# EAGLE board CPLD_brd_itead_to_mill (EAGLE 5.11)
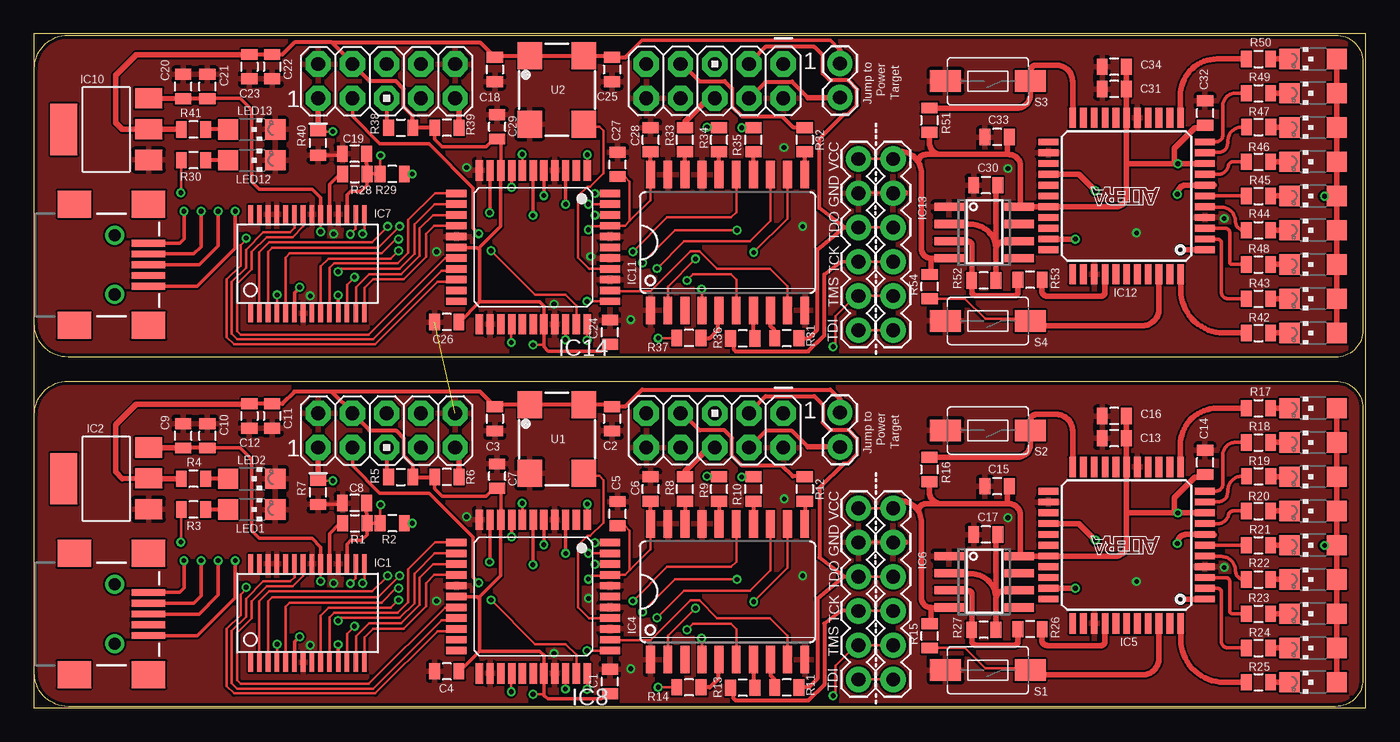
[diagram p0: board, top side]
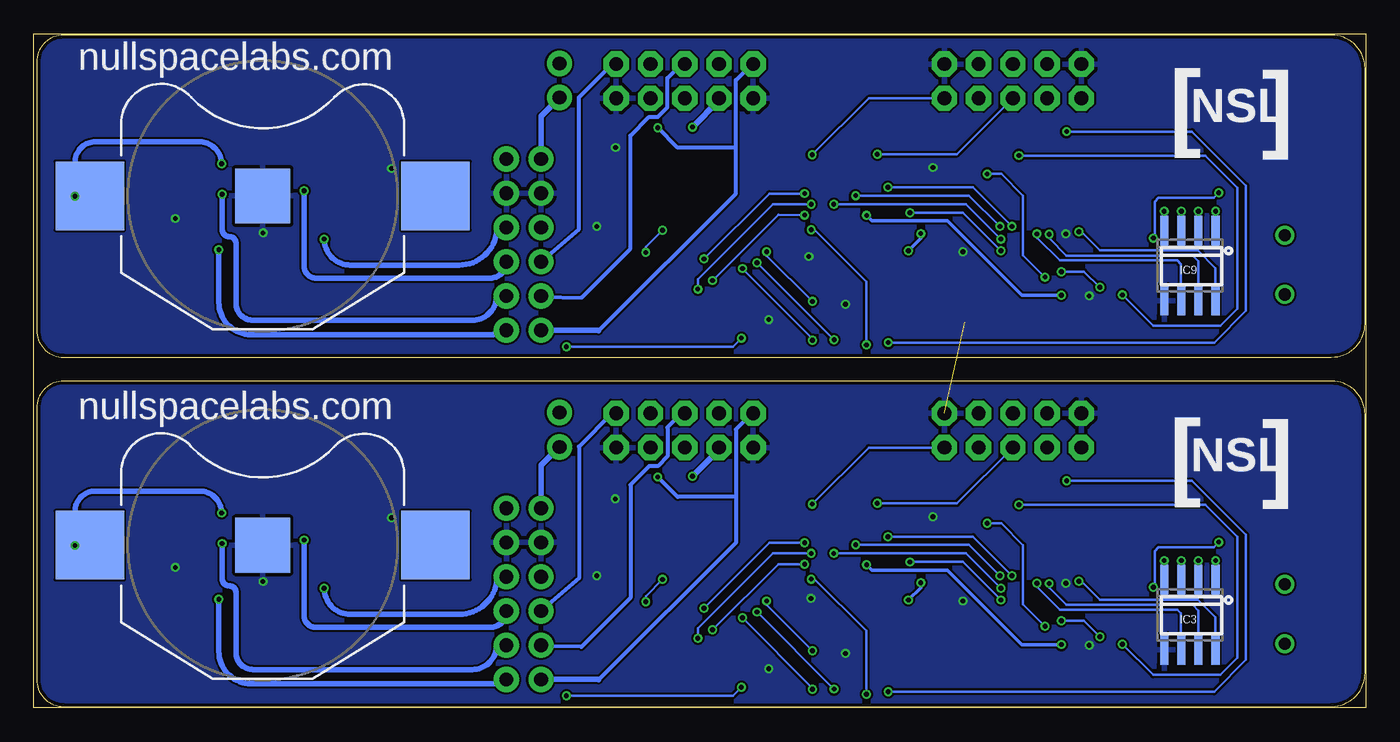
[diagram p1: board, bottom side, seen from below]

Size 98.82 x 50 mm. Coordinates in mm from the lower left corner, seen from the top.
Outline: 0,50 0,0 98.82,0 98.82,50 0,50
Outline: 2.55,0.11 arc-90 0.05,2.61 0.05,21.74 arc-90 2.55,24.24 96.6,24.24 arc-90 98.6,22.24 98.6,2.11 arc-90 96.6,0.11 2.55,0.11
Outline: 2.55,26.02 arc-90 0.05,28.52 0.05,47.39 arc-90 2.55,49.89 96.6,49.89 arc-90 98.6,47.89 98.6,28.02 arc-90 96.6,26.02 2.55,26.02
Copper layers (1*16): Top 0.035mm / dielectric 1.5mm / Bottom 0.035mm
Design rules "ITead_rule": minimum track width 6mil, minimum drill 12mil, track to track 6mil, track to pad 6mil, pad to pad 6mil, via to via 6mil, smd to smd 0mil, copper to edge 10mil, drill to drill 10mil, minimum pad ring 10mil, minimum via ring 6mil, stop-mask expansion 2mil, vias tented up to drill 100mil, thermal gap 10mil

## Footprints (pad centres in the part's own frame; a part is rotated, then mirrored left to right if it is on the bottom)
BATTCON_20MM = smd 5.08 x 5.08: 1 -12.827,0; 3 12.827,0 | smd 4.064 x 4.064: 2 0,0
0805 = smd 0.8 x 1.2: 1 -0.9,0; 2 0.9,0
SSOP28DB = smd 0.348 x 1.397: 1 -4.225,-3.656; 2 -3.575,-3.656; 3 -2.925,-3.656; 4 -2.275,-3.656; 5 -1.625,-3.656; 6 -0.975,-3.656; 7 -0.325,-3.656; 8 0.325,-3.656; 9 0.975,-3.656; 10 1.625,-3.656; 11 2.275,-3.656; 12 2.925,-3.656; 13 3.575,-3.656; 14 4.225,-3.656; 15 4.225,3.656; 16 3.575,3.656; 17 2.925,3.656; 18 2.275,3.656; 19 1.625,3.656; 20 0.975,3.656; 21 0.325,3.656; 22 -0.325,3.656; 23 -0.975,3.656; 24 -1.625,3.656; 25 -2.275,3.656; 26 -2.925,3.656; 27 -3.575,3.656; 28 -4.225,3.656
SOT223 = smd 1.499 x 2.007: 1 -2.261,-3.15; 2 0.025,-3.15; 3 2.311,-3.15 | smd 3.81 x 2.007: 4 0,3.15
SO08 = smd 0.6 x 2.2: 1 -1.905,-2.6; 2 -0.635,-2.6; 3 0.635,-2.6; 4 1.905,-2.6; 5 1.905,2.6; 6 0.635,2.6; 7 -0.635,2.6; 8 -1.905,2.6
SO20W = smd 0.66 x 2.032: 1 -5.715,-5.029; 2 -4.445,-5.029; 3 -3.175,-5.029; 4 -1.905,-5.029; 5 -0.635,-5.029; 6 0.635,-5.029; 7 1.905,-5.029; 8 3.175,-5.029; 9 4.445,-5.029; 10 5.715,-5.029; 11 5.715,5.029; 12 4.445,5.029; 13 3.175,5.029; 14 1.905,5.029; 15 0.635,5.029; 16 -0.635,5.029; 17 -1.905,5.029; 18 -3.175,5.029; 19 -4.445,5.029; 20 -5.715,5.029
TQFP44 = smd 1.5 x 0.5: 1 -5.8,4; 2 -5.8,3.2; 3 -5.8,2.4; 4 -5.8,1.6; 5 -5.8,0.8; 6 -5.8,0; 7 -5.8,-0.8; 8 -5.8,-1.6; 9 -5.8,-2.4; 10 -5.8,-3.2; 11 -5.8,-4; 23 5.8,-4; 24 5.8,-3.2; 25 5.8,-2.4; 26 5.8,-1.6; 27 5.8,-0.8; 28 5.8,0; 29 5.8,0.8; 30 5.8,1.6; 31 5.8,2.4; 32 5.8,3.2; 33 5.8,4 | smd 0.5 x 1.5: 12 -4,-5.8; 13 -3.2,-5.8; 14 -2.4,-5.8; 15 -1.6,-5.8; 16 -0.8,-5.8; 17 0,-5.8; 18 0.8,-5.8; 19 1.6,-5.8; 20 2.4,-5.8; 21 3.2,-5.8; 22 4,-5.8; 34 4,5.8; 35 3.2,5.8; 36 2.4,5.8; 37 1.6,5.8; 38 0.8,5.8; 39 0,5.8; 40 -0.8,5.8; 41 -1.6,5.8; 42 -2.4,5.8; 43 -3.2,5.8; 44 -4,5.8
TQFP44' = smd 0.55 x 1.5: P1 -4,-5.7; P2 -3.2,-5.7; P3 -2.4,-5.7; P4 -1.6,-5.7; P5 -0.8,-5.7; P6 0,-5.7; P7 0.8,-5.7; P8 1.6,-5.7; P9 2.4,-5.7; P10 3.2,-5.7; P11 4,-5.7; P23 4,5.7; P24 3.2,5.7; P25 2.4,5.7; P26 1.6,5.7; P27 0.8,5.7; P28 0,5.7; P29 -0.8,5.7; P30 -1.6,5.7; P31 -2.4,5.7; P32 -3.2,5.7; P33 -4,5.7 | smd 1.5 x 0.55: P12 5.7,-4; P13 5.7,-3.2; P14 5.7,-2.4; P15 5.7,-1.6; P16 5.7,-0.8; P17 5.7,0; P18 5.7,0.8; P19 5.7,1.6; P20 5.7,2.4; P21 5.7,3.2; P22 5.7,4; P34 -5.7,4; P35 -5.7,3.2; P36 -5.7,2.4; P37 -5.7,1.6; P38 -5.7,0.8; P39 -5.7,0; P40 -5.7,-0.8; P41 -5.7,-1.6; P42 -5.7,-2.4; P43 -5.7,-3.2; P44 -5.7,-4
1X06 = drill 1.016 pad 1.88 round: 1 0,0; 2 2.54,0; 3 5.08,0; 4 7.62,0; 5 10.16,0; 6 12.7,0
AVR_ICSP = drill 1.016 pad 1.88 octagon: 1 -1.27,5.08; 2 1.27,5.08; 3 -1.27,2.54; 4 1.27,2.54; 5 -1.27,0; 6 1.27,0; 7 -1.27,-2.54; 8 1.27,-2.54; 9 -1.27,-5.08; 10 1.27,-5.08
1X02 = drill 1.016 pad 1.88 round: 1 0,0; 2 2.54,0
CHIPLED_1206 = smd 1.5 x 1.5: A 0,-1.75; C 0,1.75
TACTILE-SWITCH-1101NE = smd 2.3 x 1.6: P$1 -3.15,0; P$2 3.15,0
CRYSTAL-SMD-7X5 = smd 2 x 1.8: P$1 -2.54,-2; P$2 2.54,-2; P$3 2.54,2; P$4 -2.54,2
USB-MINIB-NOSTOP = smd 2.5 x 0.5: D+ 2.5,0; D- 2.5,0.8; GND 2.5,-1.6; ID 2.5,-0.8; VBUS 2.5,1.6 | smd 2.5 x 2: G1 -3,-4.5; G2 -3,4.5; G3 2.5,4.5; G4 2.5,-4.5 | drill 0.9 pad 0.8 round: H1 0,2.2 | drill 0.9 pad 0.787 round: H2 0,-2.2

## Placement (x,y rotation side)
BAT1  [BATTCON_20MM]  81.83,12.07 0 bottom
BAT2  [BATTCON_20MM]  81.83,37.97 0 bottom
C1  .1 uf  [0805]  42.74,1.96 90 top
C2  2.2uf  [0805]  42.9,21.44 270 top
C3  .01uf  [0805]  34.21,21.44 270 top
C4  .1uf  [0805]  30.63,2.72 180 top
C5  .1uf  [0805]  43.32,14.4 90 top
C6  .1uf  [0805]  45.77,16.24 90 top
C7  .1uf  [0805]  34.38,17.2 90 top
C8  .1uf  [0805]  23.8,15.2 180 top
C9  .1 uf  [0805]  11.09,20.19 90 top
C10  2.2uf  [0805]  12.88,20.19 90 top
C11  .1 uf  [0805]  17.69,21.65 270 top
C12  2.2uf  [0805]  16,21.65 270 top
C13  .1uF  [0805]  80.16,20 180 top
C14  .1uF  [0805]  86.89,18.22 90 top
C15  .1uF  [0805]  71.47,16.44 180 top
C16  10uF  [0805]  80.16,21.65 180 top
C17  .1  [0805]  70.63,12.86 180 top
C18  .01uf  [0805]  34.21,47.34 270 top
C19  .1uf  [0805]  23.8,41.1 180 top
C20  .1 uf  [0805]  11.09,46.09 90 top
C21  2.2uf  [0805]  12.88,46.09 90 top
C22  .1 uf  [0805]  17.69,47.55 270 top
C23  2.2uf  [0805]  16,47.55 270 top
C24  .1 uf  [0805]  42.74,27.86 90 top
C25  2.2uf  [0805]  42.9,47.34 270 top
C26  .1uf  [0805]  30.63,28.62 180 top
C27  .1uf  [0805]  43.32,40.3 90 top
C28  .1uf  [0805]  45.77,42.14 90 top
C29  .1uf  [0805]  34.38,43.1 90 top
C30  .1  [0805]  70.63,38.76 180 top
C31  .1uF  [0805]  80.16,45.9 180 top
C32  .1uF  [0805]  86.89,44.12 90 top
C33  .1uF  [0805]  71.47,42.34 180 top
C34  10uF  [0805]  80.16,47.55 180 top
IC1  FT245RL  [SSOP28DB]  20.32,7.04 0 top
IC2  REG1117M3.3  [SOT223]  5.38,17 90 top
IC3  USB6B1  [SO08]  13.05,6.92 180 bottom
IC4  74LS244DW  [SO20W]  51.48,8.62 0 top
IC5  EPM7032T44  [TQFP44]  81.07,12.07 180 top
IC6  LM555D  [SO08]  70.51,9.35 270 top
IC7  FT245RL  [SSOP28DB]  20.32,32.94 0 top
IC8  EPM3064A-TQFP44  [TQFP44']  37.05,8.26 180 top
IC9  USB6B1  [SO08]  13.05,32.82 180 bottom
IC10  REG1117M3.3  [SOT223]  5.38,42.9 90 top
IC11  74LS244DW  [SO20W]  51.48,34.52 0 top
IC12  EPM7032T44  [TQFP44]  81.07,37.97 180 top
IC13  LM555D  [SO08]  70.51,35.25 270 top
IC14  EPM3064A-TQFP44  [TQFP44']  37.05,34.16 180 top
JP1  [1X06]  61.18,14.81 270 top
JP2  M05X2PTH  [AVR_ICSP]  50.53,20.58 270 top
JP3  [1X02]  59.81,19.36 90 top
JP4  M05X2PTH  [AVR_ICSP]  26.18,20.58 90 top
JP5  [1X06]  63.75,14.81 270 top
JP6  [1X06]  61.18,40.71 270 top
JP7  M05X2PTH  [AVR_ICSP]  50.53,46.48 270 top
JP8  M05X2PTH  [AVR_ICSP]  26.18,46.48 90 top
JP9  [1X02]  59.81,45.26 90 top
JP10  [1X06]  63.75,40.71 270 top
LED1  [CHIPLED_1206]  16.18,14.71 270 top
LED2  [CHIPLED_1206]  16.18,17 270 top
LED3  [CHIPLED_1206]  94.92,22.23 90 top
LED4  [CHIPLED_1206]  94.92,19.69 90 top
LED5  [CHIPLED_1206]  94.92,17.15 90 top
LED6  [CHIPLED_1206]  94.92,14.61 90 top
LED7  [CHIPLED_1206]  94.92,12.07 90 top
LED8  [CHIPLED_1206]  94.92,9.53 90 top
LED9  [CHIPLED_1206]  94.92,6.99 90 top
LED10  [CHIPLED_1206]  94.92,4.45 90 top
LED11  [CHIPLED_1206]  94.92,1.91 90 top
LED12  [CHIPLED_1206]  16.18,40.61 270 top
LED13  [CHIPLED_1206]  16.18,42.9 270 top
LED14  [CHIPLED_1206]  94.92,43.05 90 top
LED15  [CHIPLED_1206]  94.92,40.51 90 top
LED16  [CHIPLED_1206]  94.92,37.97 90 top
LED17  [CHIPLED_1206]  94.92,35.43 90 top
LED18  [CHIPLED_1206]  94.92,32.89 90 top
LED19  [CHIPLED_1206]  94.92,30.35 90 top
LED20  [CHIPLED_1206]  94.92,27.81 90 top
LED21  [CHIPLED_1206]  94.92,45.59 90 top
LED22  [CHIPLED_1206]  94.92,48.13 90 top
R1  1.5k  [0805]  23.83,13.7 0 top
R2  10k  [0805]  26.6,13.7 180 top
R3  1k  [0805]  11.86,14.71 180 top
R4  1k  [0805]  11.86,17 180 top
R5  10k  [0805]  27.22,17.13 0 top
R6  10k  [0805]  30.65,17.13 180 top
R7  10k  [0805]  21.09,15.99 90 top
R8  100  [0805]  48.31,16.24 90 top
R9  100  [0805]  50.85,16.24 90 top
R10  100  [0805]  53.39,16.24 90 top
R11  100  [0805]  55.88,1.52 180 top
R12  100  [0805]  57.2,16.24 270 top
R13  100  [0805]  52.6,1.5 180 top
R14  100  [0805]  48.61,1.53 180 top
R15  10k  [0805]  66.47,5.34 90 top
R16  10k  [0805]  66.44,17.68 270 top
R17  [0805]  90.85,22.23 0 top
R18  [0805]  90.85,19.69 0 top
R19  [0805]  90.88,17.18 0 top
R20  [0805]  90.85,14.61 0 top
R21  [0805]  90.85,12.07 0 top
R22  [0805]  90.85,9.53 0 top
R23  [0805]  90.85,6.99 0 top
R24  [0805]  90.85,4.45 0 top
R25  [0805]  90.85,1.91 0 top
R26  51R  [0805]  73.91,5.85 180 top
R27  100k  [0805]  70.48,5.8 180 top
R28  1.5k  [0805]  23.83,39.6 0 top
R29  10k  [0805]  26.6,39.6 180 top
R30  1k  [0805]  11.86,40.61 180 top
R31  100  [0805]  55.88,27.42 180 top
R32  100  [0805]  57.2,42.14 270 top
R33  100  [0805]  48.31,42.14 90 top
R34  100  [0805]  50.85,42.14 90 top
R35  100  [0805]  53.39,42.14 90 top
R36  100  [0805]  52.6,27.4 180 top
R37  100  [0805]  48.61,27.43 180 top
R38  10k  [0805]  27.22,43.03 0 top
R39  10k  [0805]  30.65,43.03 180 top
R40  10k  [0805]  21.09,41.89 90 top
R41  1k  [0805]  11.86,42.9 180 top
R42  [0805]  90.85,27.81 0 top
R43  [0805]  90.85,30.35 0 top
R44  [0805]  90.85,35.43 0 top
R45  [0805]  90.85,37.97 0 top
R46  [0805]  90.85,40.51 0 top
R47  [0805]  90.88,43.08 0 top
R48  [0805]  90.85,32.89 0 top
R49  [0805]  90.85,45.59 0 top
R50  [0805]  90.85,48.13 0 top
R51  10k  [0805]  66.44,43.58 270 top
R52  100k  [0805]  70.48,31.7 180 top
R53  51R  [0805]  73.91,31.75 180 top
R54  10k  [0805]  66.47,31.24 90 top
S1  SWITCH-MOMENTARY-2-SMD-1101NE  [TACTILE-SWITCH-1101NE]  70.79,2.8 180 top
S2  SWITCH-MOMENTARY-2-SMD-1101NE  [TACTILE-SWITCH-1101NE]  70.79,20.58 180 top
S3  SWITCH-MOMENTARY-2-SMD-1101NE  [TACTILE-SWITCH-1101NE]  70.79,46.48 180 top
S4  SWITCH-MOMENTARY-2-SMD-1101NE  [TACTILE-SWITCH-1101NE]  70.79,28.7 180 top
U1  OSCILLATORSMD  [CRYSTAL-SMD-7X5]  38.8,19.93 270 top
U2  OSCILLATORSMD  [CRYSTAL-SMD-7X5]  38.8,45.83 270 top
USB1  USB-SMD-NS  [USB-MINIB-NOSTOP]  6.02,6.97 0 top
USB2  USB-SMD-NS  [USB-MINIB-NOSTOP]  6.02,32.87 0 top

## Library data of the parts
BAT1 BAT2 C1 C2 C4-C7 C9-C17 C20-C34 IC1 IC7 JP1-JP10 USB1 USB2 = SparkFun
C3 C8 C18 C19 R1-R3 R28-R30 = NSL_CylonIV
IC2 IC10 = burr-brown; MPN: REG1117; OC_FARNELL: 1097566; OC_NEWARK: 14P6981
IC3 IC9 = st-microelectronics; MPN: USB6B1; OC_FARNELL: 9804358; OC_NEWARK: 26M4750
IC4 IC11 = 74xx-us
IC5 IC12 = altera; MPN: EPM7032SLC44-6N; OC_FARNELL: 1549447; OC_NEWARK: 51R9532
IC6 IC13 = linear
IC8 IC14 = dp_devices
LED1-LED22 = led
R4-R27 R31-R54 = TVbNull-Laser
S1-S4 = NSL_RFIDdle
U1 U2 = Prg_CPLD

## Nets
3V1: C18.1 C22.1 C23.1 C24.1 C25.1 C26.1 C27.1 C28.1 C29.1 IC10.2 IC11.20 IC14.P9 IC14.P17 IC14.P29 IC14.P41 JP8.4 JP9.2 R38.2 R39.2 R41.2 U2.P$1 U2.P$4
3V3: C1.1 C2.1 C3.1 C4.1 C5.1 C6.1 C7.1 C11.1 C12.1 IC2.2 IC4.20 IC8.P9 IC8.P17 IC8.P29 IC8.P41 JP3.2 JP4.4 R4.2 R5.2 R6.2 U1.P$1 U1.P$4
3V3_FT: C8.1 IC1.4 IC1.17 R1.2 R2.2
3V3_FT1: C19.1 IC7.4 IC7.17 R28.2 R29.2
5V_PC: C9.1 C10.1 IC1.20 IC2.3 IC3.8
5V_PC1: C20.1 C21.1 IC7.20 IC9.8 IC10.3
BUTTON1: IC5.42 R15.1 S1.P$1
BUTTON2: IC5.22 R16.1 S2.P$1
BUTTON3: IC12.42 R54.1 S4.P$1
BUTTON4: IC12.22 R51.1 S3.P$1
CLOCK: IC8.P37 U1.P$3
CLOCK1: IC14.P37 U2.P$3
CTCK: IC8.P26 JP4.1 R7.2
CTCK1: IC14.P26 JP8.1 R40.2
CTDI: IC8.P1 JP4.9 R6.1
CTDI1: IC14.P1 JP8.9 R39.1
CTDO: IC8.P32 JP4.3
CTDO1: IC14.P32 JP8.3
CTMS: IC8.P7 JP4.5 R5.1
CTMS1: IC14.P7 JP8.5 R38.1
D0: IC1.1
D1: IC1.5 IC8.P3
D2: IC1.3 IC8.P5
D3: IC1.11 IC8.P6
D4: IC1.2 IC8.P8
D5: IC1.9 IC8.P10
D6: IC1.10 IC8.P12
D7: IC1.6 IC8.P13
D8: IC7.1
D9: IC7.5 IC14.P3
D10: IC7.3 IC14.P5
D11: IC7.11 IC14.P6
D12: IC7.2 IC14.P8
D13: IC7.9 IC14.P10
D14: IC7.10 IC14.P12
D15: IC7.6 IC14.P13
D+: IC3.3 USB1.D+
D+1: IC9.3 USB2.D+
D-: IC3.2 USB1.D-
D-1: IC9.2 USB2.D-
DM: IC1.16 IC3.7
DM1: IC7.16 IC9.7
DO: IC8.P2
DO1: IC14.P2
DP: IC1.15 IC3.6
DP1: IC7.15 IC9.6
GCLK1: IC5.37 R26.1
GCLK2: IC12.37 R53.1
GND: BAT1.2 BAT2.2 C1.2 C2.2 C3.2 C4.2 C5.2 C6.2 C7.2 C8.2 C9.2 C10.2 C11.2 C12.2 C13.2 C14.2 C15.2 C16.2 C17.2 C18.2 C19.2 C20.2 C21.2 C22.2 C23.2 C24.2 C25.2 C26.2 C27.2 C28.2 C29.2 C30.2 C31.2 C32.2 C33.2 C34.2 IC1.7 IC1.18 IC1.21 IC1.25 IC1.26 IC2.1 IC3.5 IC4.1 IC4.10 IC4.17 IC4.19 IC5.4 IC5.16 IC5.24 IC5.36 IC6.1 IC7.7 IC7.18 IC7.21 IC7.25 IC7.26 IC8.P4 IC8.P11 IC8.P16 IC8.P24 IC8.P30 IC8.P36 IC8.P38 IC8.P40 IC9.5 IC10.1 IC11.1 IC11.10 IC11.17 IC11.19 IC12.4 IC12.16 IC12.24 IC12.36 IC13.1 IC14.P4 IC14.P11 IC14.P16 IC14.P24 IC14.P30 IC14.P36 IC14.P38 IC14.P40 JP1.2 JP2.2 JP2.10 JP4.2 JP4.10 JP5.2 JP6.2 JP7.2 JP7.10 JP8.2 JP8.10 JP10.2 LED1.C LED2.C LED12.C LED13.C R7.1 R40.1 S1.P$2 S2.P$2 S3.P$2 S4.P$2 U1.P$2 U2.P$2
N$1: LED5.C R19.2
N$2: LED2.A R4.1
N$3: LED1.A R3.1
N$4: IC1.19 R1.1
N$5: LED6.C R20.2
N$6: IC4.8 R11.2
N$7: LED9.C R23.2
N$8: IC1.12 R2.1
N$9: IC4.18 R8.1
N$10: IC4.16 R9.1
N$11: IC4.14 R10.1
N$12: LED7.C R21.2
N$13: IC8.P20 R3.2
N$14: LED8.C R22.2
N$15: IC4.7 R13.1
N$16: IC4.5 R14.1
N$17: LED10.C R24.2
N$18: IC4.11 R12.2
N$19: LED11.C R25.2
N$20: LED3.C R17.2
N$22: IC5.12 R17.1
N$23: IC5.11 R18.1
N$24: IC5.10 R19.1
N$25: IC5.8 R20.1
N$26: IC5.6 R21.1
N$27: IC5.5 R22.1
N$28: IC5.3 R23.1
N$29: IC5.2 R24.1
N$30: IC5.44 R25.1
N$31: IC7.19 R28.1
N$32: IC7.12 R29.1
N$33: IC14.P20 R30.2
N$34: LED12.A R30.1
N$35: LED4.C R18.2
N$36: IC11.8 R31.2
N$37: IC11.18 R33.1
N$38: IC11.16 R34.1
N$39: IC6.3 R26.2 R27.2
N$40: C17.1 IC6.2 IC6.6 R27.1
N$41: IC11.14 R35.1
N$42: IC11.7 R36.1
N$43: IC11.5 R37.1
N$44: IC11.11 R32.2
N$45: LED13.A R41.1
N$46: LED14.C R47.2
N$47: LED15.C R46.2
N$48: LED16.C R45.2
N$49: LED17.C R44.2
N$50: LED18.C R48.2
N$51: LED19.C R43.2
N$52: LED20.C R42.2
N$53: IC12.12 R50.1
N$54: IC12.11 R49.1
N$55: IC12.10 R47.1
N$56: IC12.8 R46.1
N$57: IC12.6 R45.1
N$58: IC12.5 R44.1
N$59: IC12.3 R48.1
N$60: IC12.2 R43.1
N$61: IC12.44 R42.1
N$62: LED21.C R49.2
N$63: IC13.3 R52.2 R53.2
N$64: C30.1 IC13.2 IC13.6 R52.1
N$65: LED22.C R50.2
ONCE: JP2.6 R8.2
ONCE1: JP7.6 R33.2
ONCS: JP2.8 R9.2
ONCS1: JP7.8 R34.2
ONSTA: JP2.7 R12.1
ONSTA1: JP7.7 R32.1
OTCK: JP1.4 JP2.1 R13.2
OTCK1: JP6.4 JP7.1 R36.2
OTDI: JP1.6 JP2.9 R10.2
OTDI1: JP6.6 JP7.9 R35.2
OTDO: JP1.3 JP2.3 R11.1
OTDO1: JP6.3 JP7.3 R31.1
OTMS: JP1.5 JP2.5 R14.2
OTMS1: JP6.5 JP7.5 R37.2
RD: IC1.13 IC8.P14
RD1: IC7.13 IC14.P14
RXF: IC1.23 IC8.P19
RXF1: IC7.23 IC14.P19
SNCE: IC4.2 IC8.P44
SNCE1: IC11.2 IC14.P44
SNCS: IC4.4 IC8.P43
SNCS1: IC11.4 IC14.P43
SNSTA: IC4.9 IC8.P35
SNSTA1: IC11.9 IC14.P35
STCK: IC4.13 IC8.P33
STCK1: IC11.13 IC14.P33
STDI: IC4.6 IC8.P42
STDI1: IC11.6 IC14.P42
STDO: IC4.12 IC8.P31
STDO1: IC11.12 IC14.P31
STMS: IC4.15 IC8.P34
STMS1: IC11.15 IC14.P34
TCK: IC5.26 JP5.4
TCK1: IC12.26 JP10.4
TDI: IC5.1 JP5.6
TDI1: IC12.1 JP10.6
TDO: IC5.32 JP5.3
TDO1: IC12.32 JP10.3
TMS: IC5.7 JP5.5
TMS1: IC12.7 JP10.5
TXE: IC1.22 IC8.P18
TXE1: IC7.22 IC14.P18
USB_GND: IC3.4 USB1.GND
USB_GND1: IC9.4 USB2.GND
VBUS: IC3.1 USB1.VBUS
VBUS1: IC9.1 USB2.VBUS
VCC: BAT1.1 C13.1 C14.1 C15.1 C16.1 IC5.9 IC5.17 IC5.29 IC6.4 IC6.8 JP5.1 LED3.A LED4.A LED5.A LED6.A LED7.A LED8.A LED9.A LED10.A LED11.A R15.2 R16.2
VCC1: BAT2.1 C31.1 C32.1 C33.1 C34.1 IC12.9 IC12.17 IC12.29 IC13.4 IC13.8 JP10.1 LED14.A LED15.A LED16.A LED17.A LED18.A LED19.A LED20.A LED21.A LED22.A R51.2 R54.2
VCC_TARGET: JP1.1 JP2.4 JP3.1
VCC_TARGET1: JP6.1 JP7.4 JP9.1
WR: IC1.14 IC8.P15
WR1: IC7.14 IC14.P15

## Tracks (layer width: path | path; a pad name or v marks a point on that pad's centre or on a via)
3V1  (via drill 0.36)
  Top 0.203: 44.26,36.16 43.86,35.76 IC14.P41 | 44.26,36.16 45.77,37.67 IC11.20 | IC11.20 | IC14.P41 42.73,35.74 | 34.64,35.71 34.67,35.74 | C27.1 43.85,39.4 44.22,39.04 44.22,36.19 44.26,36.16 | C28.1 | IC14.P41 42.7,35.71 41.4,35.71 v41.14,35.46 | 37.84,26.92 v37.05,26.92
  Top 0.254: 43.87,48.24 45.13,49.5 59.1,49.5 59.81,48.79 | IC14.P17 31.38,34.14 32.89,34.14 33.09,33.93 | 33.09,33.93 33.09,30.12 | 33.09,30.12 31.58,28.62 C26.1 | R39.2 29.74,43.01 29.74,42.16 30.3,41.6 33.57,41.6 34.17,42.2 C29.1 34.65,41.93 IC14.P9 34.64,39.85 34.64,35.71 33.09,34.16 33.09,33.93 | 33.09,30.12 37.54,30.12 37.87,29.79 37.87,28.47 IC14.P29 37.84,28.45 37.84,26.92 37.84,26.8 38.17,26.46 42.11,26.46 42.61,26.96 C24.1
  Top 0.305: IC11.20 C28.1 | 15.98,48.44 C23.1 C22.1 18.45,48.45 19.34,49.35 22.12,49.35 | IC10.2 8.43,42.9 | R39.2 R38.2 28.12,43.93 27.45,44.6 27.45,45.9 26.87,46.48 24.91,46.48 JP8.4 23.64,47.83 22.12,49.35 | C18.1 34.24,48.22 | U2.P$4 40.64,48.24 | C18.1 33.1,49.35 22.12,49.35 | 43.87,48.24 C25.1 42.9,48.37 U2.P$4 | C18.1 34.21,48.37 U2.P$1 U2.P$4
  Top 0.406: IC10.2 6.57,42.9 6.07,43.41 6.07,46.91 7.59,48.44 15.98,48.44 | 8.43,42.9 R41.2 | 59.81,48.79 JP9.2
  Bottom 0.203: v41.14,35.46 40.89,35.46 37.05,31.62 v37.05,26.92
3V3  (via drill 0.36)
  Top 0.203: 44.26,10.26 43.86,9.86 IC8.P41 | 44.26,10.26 45.77,11.77 IC4.20 | IC4.20 | IC8.P41 42.73,9.84 | 34.64,9.81 34.67,9.84 | C5.1 43.85,13.5 44.22,13.14 44.22,10.29 44.26,10.26 | C6.1 | IC8.P41 42.7,9.81 41.4,9.81 v41.14,9.56 | 37.84,1.02 v37.05,1.02
  Top 0.254: IC8.P17 31.38,8.24 32.89,8.24 33.09,8.03 | 33.09,8.03 33.09,4.22 | 33.09,4.22 31.58,2.71 C4.1 | R6.2 29.74,17.11 29.74,16.26 30.3,15.7 33.57,15.7 34.17,16.3 C7.1 34.65,16.03 IC8.P9 34.64,13.95 34.64,9.81 33.09,8.26 33.09,8.03 | 33.09,4.22 37.54,4.22 37.87,3.89 37.87,2.57 IC8.P29 37.84,2.55 37.84,1.02 37.84,0.89 38.15,0.69 42.08,0.69 42.61,1.06 C1.1
  Top 0.305: IC4.20 C6.1 | 15.98,22.54 C12.1 C11.1 18.45,22.55 19.34,23.45 22.12,23.45 | IC2.2 8.43,17 | R6.2 R5.2 28.12,18.03 27.45,18.7 27.45,20 26.87,20.58 24.91,20.58 JP4.4 23.64,21.93 22.12,23.45 | C3.1 34.24,22.32 | U1.P$4 40.64,22.34 | C3.1 33.1,23.45 22.12,23.45 | C3.1 34.21,22.47 U1.P$1 U1.P$4 | U1.P$4 42.9,22.47 C2.1 43.87,22.34 45.13,23.6 59.1,23.6 59.81,22.89
  Top 0.406: IC2.2 6.57,17 6.07,17.51 6.07,21.01 7.59,22.54 15.98,22.54 | 8.43,17 R4.2 | 59.81,22.89 JP3.2
  Bottom 0.203: v41.14,9.56 40.89,9.56 37.05,5.72 v37.05,1.02
3V3_FT  (via drill 0.36)
  Top 0.203: IC1.4 v18.06,4.73 | v25.73,15.07 25.7,15.04 R2.2
  Top 0.254: IC1.17 23.24,12.15 23.52,12.43 24.3,12.43 24.73,12.85 R1.2 R2.2
  Top 0.305: R1.2 C8.1
  Bottom 0.203: v18.06,4.73 15.77,2.45 10.79,2.45 9.52,3.71 9.52,12.68 11.91,15.07 v25.73,15.07
3V3_FT1  (via drill 0.36)
  Top 0.203: IC7.4 v18.06,30.63 | v25.73,40.97 25.7,40.94 R29.2
  Top 0.254: IC7.17 23.24,38.05 23.52,38.33 24.3,38.33 24.73,38.75 R28.2 R29.2
  Top 0.305: R28.2 C19.1
  Bottom 0.203: v18.06,30.63 15.77,28.34 10.79,28.34 9.52,29.62 9.52,38.58 11.91,40.97 v25.73,40.97
5V_PC  (via drill 0.36)
  Top 0.203: IC1.20 21.28,10.69 v21.28,9.4
  Top 0.254: C10.1 12.91,19.31 15.31,19.31 16.18,18.45 16.18,13.14 16.73,12.58 20.65,12.58 21.29,11.94 IC1.20
  Top 0.305: IC2.3 8.4,19.29 | C10.1 C9.1
  Top 0.406: C9.1 IC2.3
  Bottom 0.203: IC3.8 11.15,6.71 12.47,8.03 19.73,8.03 21.1,9.4 v21.28,9.4
5V_PC1  (via drill 0.36)
  Top 0.203: IC7.20 21.28,36.59 v21.28,35.3
  Top 0.254: C21.1 12.91,45.21 15.31,45.21 16.18,44.35 16.18,39.04 16.73,38.48 20.65,38.48 21.29,37.84 IC7.20
  Top 0.305: IC10.3 8.4,45.19 | C21.1 C20.1
  Top 0.406: C20.1 IC10.3
  Bottom 0.203: IC9.8 11.15,32.61 12.47,33.93 19.73,33.93 21.1,35.3 v21.28,35.3
BUTTON1
  Top 0.203: 66.48,4.45 69.08,4.45 70.58,2.95 73.78,2.95 arc-90 S1.P$1
  Top 0.406: 66.48,4.45 R15.1 | S1.P$1 arc-90 73.71,2.45 82.24,2.45 arc90 83.47,3.68 IC5.42
BUTTON2
  Top 0.406: S2.P$1 73.68,20.89 | IC5.22 77.07,20.54 arc90 75.84,21.77 74.39,21.77 arc90 73.94,21.32 S2.P$1 arc90 S2.P$1 | R16.1 72.96,18.59 arc90 73.94,19.56 S2.P$1 | S2.P$1 arc-90 S2.P$1
BUTTON3
  Top 0.203: 66.48,30.35 69.08,30.35 70.58,28.85 73.78,28.85 arc-90 S4.P$1
  Top 0.406: R54.1 66.48,30.35 | S4.P$1 arc-90 73.71,28.34 82.24,28.34 arc90 83.47,29.58 IC12.42
BUTTON4
  Top 0.406: S3.P$1 73.68,46.79 | IC12.22 77.07,46.44 arc90 75.84,47.67 74.39,47.67 arc90 73.94,47.22 S3.P$1 arc90 S3.P$1 | R51.1 72.96,44.48 arc90 73.94,45.46 S3.P$1 | S3.P$1 arc-90 S3.P$1
CLOCK
  Top 0.203: 40.8,17.2 41.96,17.2 42.26,16.9 42.26,13.75 41.27,12.76 41.07,12.76 40.38,12.07 40.38,7.47 41.19,6.66 IC8.P37 | IC8.P37
  Top 0.305: 40.65,17.2 U1.P$3 40.8,17.2
CLOCK1
  Top 0.203: 40.8,43.1 41.96,43.1 42.26,42.8 42.26,39.65 41.27,38.66 41.07,38.66 40.38,37.97 40.38,33.37 41.19,32.56 IC14.P37 | IC14.P37
  Top 0.305: 40.65,43.1 U2.P$3 40.8,43.1
CTCK  (via drill 0.36)
  Top 0.203: IC8.P26 35.43,2.54 v35.43,1.2 | v22.2,16.85 21.14,16.85 R7.2
  Top 0.305: JP4.1 21.09,19.3
  Top 0.406: 21.09,19.3 R7.2
  Bottom 0.203: v35.43,1.2 11.25,1.2 8.89,3.56 8.89,12.83 12.9,16.85 v22.2,16.85
CTCK1  (via drill 0.36)
  Top 0.203: IC14.P26 35.43,28.44 v35.43,27.1 | v22.2,42.75 21.14,42.75 R40.2
  Top 0.305: 21.09,45.2 JP8.1
  Top 0.406: R40.2 21.09,45.2
  Bottom 0.203: v35.43,27.1 11.25,27.1 8.89,29.46 8.89,38.73 12.9,42.75 v22.2,42.75
CTDI  (via drill 0.36)
  Top 0.203: IC8.P1 41.05,15.11 v41.07,15.12
  Top 0.406: JP4.9 31.55,19.02 R6.1
  Bottom 0.203: v41.07,15.12 36.88,19.31 JP4.9
CTDI1  (via drill 0.36)
  Top 0.203: IC14.P1 41.05,41.01 v41.07,41.02
  Top 0.406: JP8.9 31.55,44.92 R39.1
  Bottom 0.203: v41.07,41.02 36.88,45.21 JP8.9
CTDO  (via drill 0.36)
  Top 0.203: v33.93,8.01 37.21,4.73 39.47,4.73 40.25,3.94 IC8.P32
  Top 0.254: IC8.P32 | v33.02,9.28 32.61,9.68 32.61,12.66 29.33,15.93 25.68,15.93 23.64,17.96 JP4.3
  Bottom 0.254: v33.93,8.01 33.02,8.92 v33.02,9.28
CTDO1  (via drill 0.36)
  Top 0.203: v33.93,33.91 37.21,30.63 39.47,30.63 40.25,29.84 IC14.P32
  Top 0.254: IC14.P32 | v33.02,35.18 32.61,35.58 32.61,38.56 29.33,41.83 25.68,41.83 23.64,43.86 JP8.3
  Bottom 0.254: v33.93,33.91 33.02,34.82 v33.02,35.18
CTMS  (via drill 0.36)
  Top 0.203: IC8.P7 36.25,15.16 v36.24,15.17
  Top 0.305: R5.1 26.18,17.01 JP4.5
  Bottom 0.203: v36.24,15.17 30.32,15.17 JP4.5
CTMS1  (via drill 0.36)
  Top 0.203: IC14.P7 36.25,41.06 v36.24,41.07
  Top 0.305: R38.1 26.18,42.91 JP8.5
  Bottom 0.203: v36.24,41.07 30.32,41.07 JP8.5
D1  (via drill 0.36)
  Top 0.203: 18.72,3.41 18.69,3.44 18.69,7.5 18.99,7.8 25.8,7.8 26.89,8.9 v27.07,8.87
  Top 0.254: 18.72,3.41 IC1.5 | v39.47,11.46 39.45,11.47 IC8.P3
  Bottom 0.203: v27.07,8.87 29.66,11.46 v39.47,11.46
D2  (via drill 0.36)
  Top 0.203: IC1.3 17.39,7.93 17.67,8.21 25.55,8.21 v27.15,9.81
  Top 0.254: v37.84,12.1 37.85,12.08 IC8.P5
  Bottom 0.203: v27.15,9.81 29.43,12.1 v37.84,12.1
D3  (via drill 0.36)
  Top 0.254: IC8.P6 37.03,13.94 v37.03,10.62 | v22.58,4.7 22.59,4.69 IC1.11
  Bottom 0.254: v37.03,10.62 36.62,10.22 31.03,10.22 25.52,4.7 v22.58,4.7
D4  (via drill 0.36)
  Top 0.203: IC1.2 16.73,7.91 17.47,8.64 25.12,8.64 26.26,9.79 v26.26,9.81 26.23,9.81
  Top 0.254: IC1.2 | v35.45,12.71 IC8.P8
  Bottom 0.203: v26.26,9.81 29.13,12.71 v35.45,12.71
D5  (via drill 0.36)
  Top 0.203: v27.07,8.01 26.49,7.42 21.87,7.42 21.29,6.85 IC1.9
  Top 0.254: IC1.9 21.28,3.4 | IC8.P10 33.85,10.9 v33.83,10.83
  Bottom 0.203: v27.07,8.01 29.89,10.83 v33.83,10.83
D6
  Top 0.203: IC1.10 21.99,3.44 | 31.21,12.4 arc-90 IC8.P12 31.34,12.28 29.76,12.28 27.78,10.29 27.78,7.86 27,7.07 22.27,7.07 21.94,6.74 IC1.10
  Top 0.254: IC1.10
D7  (via drill 0.36)
  Top 0.203: v22.58,6.46 22.8,6.69 27.15,6.69 28.24,7.78 28.24,9.96 29.74,11.46 IC8.P13
  Top 0.254: v19.73,5.29 19.34,4.9 IC1.6
  Bottom 0.203: v19.73,5.29 20.9,6.46 v22.58,6.46
D9  (via drill 0.36)
  Top 0.203: 18.72,29.31 18.69,29.34 18.69,33.4 18.99,33.7 25.8,33.7 26.89,34.8 v27.07,34.77
  Top 0.254: 18.72,29.31 IC7.5 | v39.47,37.36 39.45,37.38 IC14.P3
  Bottom 0.203: v27.07,34.77 29.66,37.36 v39.47,37.36
D10  (via drill 0.36)
  Top 0.203: IC7.3 17.39,33.83 17.67,34.11 25.55,34.11 v27.15,35.71
  Top 0.254: v37.84,38 37.85,37.98 IC14.P5
  Bottom 0.203: v27.15,35.71 29.43,38 v37.84,38
D11  (via drill 0.36)
  Top 0.254: IC14.P6 37.03,39.84 v37.03,36.52 | v22.58,30.61 22.59,30.59 IC7.11
  Bottom 0.254: v37.03,36.52 36.62,36.12 31.03,36.12 25.52,30.61 v22.58,30.61
D12  (via drill 0.36)
  Top 0.203: IC7.2 16.73,33.81 17.47,34.54 25.12,34.54 26.26,35.69 v26.26,35.71 26.23,35.71
  Top 0.254: IC7.2 | v35.45,38.61 IC14.P8
  Bottom 0.203: v26.26,35.71 29.13,38.61 v35.45,38.61
D13  (via drill 0.36)
  Top 0.203: v27.07,33.91 26.49,33.32 21.87,33.32 21.29,32.75 IC7.9
  Top 0.254: IC7.9 21.28,29.3 | IC14.P10 33.85,36.8 v33.83,36.73
  Bottom 0.203: v27.07,33.91 29.89,36.73 v33.83,36.73
D14
  Top 0.203: IC7.10 21.99,29.34 | 31.21,38.3 arc-90 IC14.P12 31.34,38.17 29.76,38.17 27.78,36.19 27.78,33.76 27,32.97 22.27,32.97 21.94,32.64 IC7.10
  Top 0.254: IC7.10
D15  (via drill 0.36)
  Top 0.203: v22.58,32.36 22.8,32.59 27.15,32.59 28.24,33.68 28.24,35.86 29.74,37.36 IC14.P13
  Top 0.254: v19.73,31.19 19.34,30.8 IC7.6
  Bottom 0.203: v19.73,31.19 20.9,32.36 v22.58,32.36
D+  (via drill 0.36)
  Top 0.254: USB1.D+ 12.26,6.97 13.69,8.39 v13.69,10.93
  Bottom 0.254: v13.69,10.93 IC3.3
D+1  (via drill 0.36)
  Top 0.254: USB2.D+ 12.26,32.87 13.69,34.29 v13.69,36.83
  Bottom 0.254: IC9.3 v13.69,36.83
D-  (via drill 0.36)
  Top 0.254: USB1.D- 11.87,7.77 12.42,8.31 v12.42,10.93
  Bottom 0.254: v12.42,10.93 IC3.2
D-1  (via drill 0.36)
  Top 0.254: USB2.D- 11.87,33.67 12.42,34.21 v12.42,36.83
  Bottom 0.254: IC9.2 v12.42,36.83
DM  (via drill 0.36)
  Top 0.203: v23.49,9.23 23.89,9.63 IC1.16
  Bottom 0.203: IC3.7 12.42,7.22 12.85,7.65 22.22,7.65 23.49,8.92 v23.49,9.23
DM1  (via drill 0.36)
  Top 0.203: v23.49,35.13 23.89,35.53 IC7.16
  Bottom 0.203: IC9.7 12.42,33.12 12.85,33.55 22.22,33.55 23.49,34.82 v23.49,35.13
DP  (via drill 0.36)
  Top 0.203: IC1.15 24.54,9.36 v24.41,9.25
  Bottom 0.203: 13.66,4.34 13.71,4.39 13.71,7.02 13.99,7.3 22.7,7.3 24.35,8.95 v24.41,9.25
  Bottom 0.254: 13.66,4.34 IC3.6
DP1  (via drill 0.36)
  Top 0.203: IC7.15 24.54,35.26 v24.41,35.15
  Bottom 0.203: 13.66,30.24 13.71,30.29 13.71,32.92 13.99,33.2 22.7,33.2 24.35,34.85 v24.41,35.15
  Bottom 0.254: 13.66,30.24 IC9.6
GCLK1
  Top 0.406: R26.1 arc90 74.77,5.81 74.77,5.09 arc90 75.23,4.63 79.17,4.63 arc90 79.47,4.93 IC5.37
GCLK2
  Top 0.406: R53.1 arc90 74.77,31.71 74.77,30.99 arc90 75.23,30.53 79.17,30.53 arc90 79.47,30.83 IC12.37
GND  (via drill 0.36)  (1 unrouted)
  Top 0.203: 64.66,12.3 61.16,12.3 | 61.16,38.2 64.66,38.2
  Top 0.254: R7.1 22.9,15.09 C8.2 | R40.1 22.9,40.99 C19.2
  Top 0.406: JP5.2 64.66,12.3 | 64.66,38.2 JP10.2
  other vias: 57.04,9.81 72.26,14.1 20.52,4.65 22.25,9.25 29.89,7.93 32.1,14.18 38.6,4.05 44.29,2.9 55.67,15.5 88.31,10.42 81.81,9.38 57.04,35.71 72.26,40 20.52,30.55 22.25,35.15 29.89,33.83 32.1,40.08 38.6,29.95 44.29,28.8 55.65,41.56 88.31,36.3 81.81,35.23 41.32,33.48 41.17,8.12
  pour Top: -0.44,24.25 99.56,24.25 99.56,0 -0.44,0
  pour Bottom: -0.44,24.25 99.56,24.25 99.56,0 -0.44,0
  pour Top: -0.44,51 99.56,51 99.56,26 -0.44,26
  pour Bottom: 0.06,26 -0.44,51 99.56,51 100.06,26
N$1
  Top 0.406: R19.2 arc90 91.8,17.15 LED5.C
N$2
  Top 0.305: LED2.A R4.1
N$3
  Top 0.305: R3.1 LED1.A
N$4
  Top 0.254: IC1.19 21.94,12.94 22.7,13.7 R1.1
N$5
  Top 0.406: LED6.C R20.2
N$6
  Top 0.305: R11.2 54.94,1.56 54.94,2.14 54.66,2.42 IC4.8
N$7
  Top 0.406: LED9.C R23.2
N$8  (via drill 0.36)
  Top 0.203: IC1.12 23.24,5.49 v23.8,6.05 | v28.09,13.7 R2.1
  Bottom 0.203: v28.09,13.7 27.05,13.7 25.42,12.07 25.42,7.68 v23.8,6.05
N$9
  Top 0.305: IC4.18 R8.1
N$10
  Top 0.305: IC4.16 R9.1
N$11
  Top 0.305: IC4.14 R10.1
N$12
  Top 0.406: LED7.C R21.2
N$13  (via drill 0.36)
  Top 0.203: IC8.P20 31.21,5.72 30.7,5.72 30.68,5.7 29.97,5.7 25.34,1.07 14.85,1.07 14.32,1.61 14.32,5.87 15.34,6.89 15.34,8.41 15.77,8.85 v15.77,8.95 | v10.92,12.3 10.96,12.34 R3.2
  Bottom 0.203: v15.77,8.95 15.67,9.05 15.67,11.64 15.39,11.92 11.27,11.92 10.92,12.28 v10.92,12.3
N$14
  Top 0.406: LED8.C R22.2
N$15
  Top 0.305: R13.1 53.39,1.62 IC4.7
N$16
  Top 0.305: IC4.5 50.77,3.51 50.77,2.14 50.16,1.53 R14.1
N$17
  Top 0.406: LED10.C R24.2
N$18
  Top 0.305: IC4.11 R12.2
N$19
  Top 0.406: LED11.C R25.2
N$20
  Top 0.406: R17.2 LED3.C
N$21
  Top 0.203: 61.13,9.71 61.16,9.73 63.78,9.73
N$22
  Top 0.254: IC5.12 arc-90 85.06,17.88
  Top 0.406: 85.06,17.88 85.06,19.49 arc-90 87.8,22.23 R17.1
N$23
  Top 0.254: IC5.11 arc-90 86.89,16.09 87.7,16.09 arc90 88.21,16.59 88.21,18.75 arc-90 89.15,19.69 R18.1
N$24
  Top 0.254: IC5.10 arc-90 86.9,15.3 87.88,15.3 arc90 88.57,15.98 88.59,16.13 arc-90 89.58,17.18 R19.1
N$25
  Top 0.254: IC5.8 87.7,13.67 arc79 88.62,14.23 arc-90 89,14.61 R20.1
N$26
  Top 0.254: IC5.6 R21.1
N$27
  Top 0.254: IC5.5 arc90 86.91,11.23 88.11,11.23 arc-90 89.15,10.19 arc101 R22.1
N$28
  Top 0.254: IC5.3 arc90 86.89,9.66 88.44,9.66 arc-90 88.72,9.38 88.72,7.2 arc90 88.92,6.99 R23.1
N$29
  Top 0.254: 87.8,8.87 IC5.2 | 87.8,8.87 arc90 87.8,8.87 | 87.8,8.87 arc-90 88.11,8.57 88.11,4.93 arc90 88.59,4.45 R24.1
N$30
  Top 0.406: R25.1 88.29,1.91 arc-90 85.09,5.11 85.09,6.26 arc90 IC5.44
N$31
  Top 0.254: IC7.19 21.94,38.84 22.7,39.59 R28.1
N$32  (via drill 0.36)
  Top 0.203: IC7.12 23.24,31.39 v23.8,31.95 | v28.09,39.6 R29.1
  Bottom 0.203: v28.09,39.6 27.05,39.6 25.42,37.97 25.42,33.58 v23.8,31.95
N$33  (via drill 0.36)
  Top 0.203: IC14.P20 31.21,31.62 30.7,31.62 30.68,31.6 29.97,31.6 25.34,26.97 14.85,26.97 14.32,27.51 14.32,31.77 15.34,32.79 15.34,34.31 15.77,34.75 v15.77,34.85 | v10.92,38.2 10.96,38.24 R30.2
  Bottom 0.203: v15.77,34.85 15.67,34.95 15.67,37.54 15.39,37.82 11.27,37.82 10.92,38.17 v10.92,38.2
N$34
  Top 0.305: R30.1 LED12.A
N$35
  Top 0.406: LED4.C R18.2
N$36
  Top 0.305: R31.2 54.94,27.46 54.94,28.04 54.66,28.32 IC11.8
N$37
  Top 0.305: IC11.18 R33.1
N$38
  Top 0.305: IC11.16 R34.1
N$39
  Top 0.406: IC6.3 67.91,8.69 69.36,8.69 arc-90 69.58,8.48 R27.2 arc-90 69.59,5.79 69.59,4.98 arc90 69.92,4.66 72.74,4.66 arc90 73.01,4.92 R26.2
N$40
  Top 0.406: IC6.6 71.98,8.72 71.98,8.69 arc90 71.38,8.09 | R27.1 71.38,8.09 | IC6.2 arc90 67.93,9.96 69.51,9.96 arc-90 71.38,8.09 | C17.1 arc90 71.38,12.71 71.38,8.09
N$41
  Top 0.305: IC11.14 R35.1
N$42
  Top 0.305: R36.1 53.39,27.52 IC11.7
N$43
  Top 0.305: IC11.5 50.77,29.41 50.77,28.04 50.16,27.43 R37.1
N$44
  Top 0.305: IC11.11 R32.2
N$45
  Top 0.305: LED13.A R41.1
N$46
  Top 0.406: R47.2 arc90 91.8,43.05 LED14.C
N$47
  Top 0.406: LED15.C R46.2
N$48
  Top 0.406: LED16.C R45.2
N$49
  Top 0.406: LED17.C R44.2
N$50
  Top 0.406: LED18.C R48.2
N$51
  Top 0.406: LED19.C R43.2
N$52
  Top 0.406: LED20.C R42.2
N$53
  Top 0.254: IC12.12 arc-90 85.06,43.78
  Top 0.406: 85.06,43.78 85.06,45.39 arc-90 87.8,48.13 R50.1
N$54
  Top 0.254: IC12.11 arc-90 86.89,41.98 87.7,41.98 arc90 88.21,42.49 88.21,44.65 arc-90 89.15,45.59 R49.1
N$55
  Top 0.254: IC12.10 arc-90 86.9,41.2 87.88,41.2 arc90 88.57,41.88 88.59,42.03 arc-90 89.58,43.08 R47.1
N$56
  Top 0.254: IC12.8 87.7,39.57 arc79 88.62,40.13 arc-90 89,40.51 R46.1
N$57
  Top 0.254: IC12.6 R45.1
N$58
  Top 0.254: IC12.5 arc90 86.91,37.13 88.11,37.13 arc-90 89.15,36.09 arc101 R44.1
N$59
  Top 0.254: IC12.3 arc90 86.89,35.56 88.44,35.56 arc-90 88.72,35.28 88.72,33.09 arc90 88.92,32.89 R48.1
N$60
  Top 0.254: 87.8,34.77 IC12.2 | 87.8,34.77 arc90 87.8,34.77 | 87.8,34.77 arc-90 88.11,34.47 88.11,30.83 arc90 88.59,30.35 R43.1
N$61
  Top 0.406: R42.1 88.29,27.81 arc-90 85.09,31.01 85.09,32.16 arc90 IC12.44
N$62
  Top 0.406: LED21.C R49.2
N$63
  Top 0.406: IC13.3 67.91,34.59 69.36,34.59 arc-90 69.58,34.38 R52.2 arc-90 69.59,31.69 69.59,30.88 arc90 69.92,30.55 72.74,30.55 arc90 73.01,30.82 R53.2
N$64
  Top 0.406: IC13.6 71.98,34.62 71.98,34.59 arc90 71.38,33.99 | R52.1 71.38,33.99 | IC13.2 arc90 67.93,35.86 69.51,35.86 arc-90 71.38,33.99 | C30.1 arc90 71.38,38.61 71.38,33.99
N$65
  Top 0.406: R50.2 LED22.C
N$66
  Top 0.203: 61.13,35.61 61.16,35.63 63.78,35.63
ONCE
  Top 0.305: R8.2
  Top 0.406: R8.2 48.31,17.56 50.06,19.31 JP2.6
ONCE1
  Top 0.305: R33.2
  Top 0.406: R33.2 48.31,43.46 50.06,45.21 JP7.6
ONCS  (via drill 0.36)
  Top 0.305: R9.2 50.81,17.18 v49.96,17.18
  Bottom 0.406: v49.96,17.18 47.99,19.15 JP2.8
ONCS1  (via drill 0.36)
  Top 0.305: R34.2 50.81,43.08 v49.96,43.08
  Bottom 0.406: v49.96,43.08 47.99,45.05 JP7.8
ONSTA
  Top 0.305: R12.1 57.16,17.18 56.31,17.18 55.52,17.96 52.55,17.96 51.81,18.7 51.81,20.02 51.25,20.58 49.4,20.58 48.13,21.85 JP2.7
ONSTA1
  Top 0.305: R32.1 57.16,43.08 56.31,43.08 55.52,43.86 52.55,43.86 51.81,44.6 51.81,45.92 51.25,46.48 49.4,46.48 48.13,47.75 JP7.7
OTCK
  Top 0.203: JP1.4 63.72,7.2
  Top 0.305: R13.2 51.91,1.29 51.91,0.72 52.09,0.54 57.45,0.54 58.64,1.73 58.64,6.25 59.93,7.21 JP1.4
  Bottom 0.305: JP2.1 55.9,21.85 58.36,19.39 58.36,9.61 JP1.4
OTCK1
  Top 0.203: JP6.4 63.72,33.09
  Top 0.305: R36.2 51.91,27.19 51.91,26.62 52.09,26.44 57.45,26.44 58.64,27.63 58.64,32.16 59.93,33.11 JP6.4
  Bottom 0.305: JP7.1 55.9,47.75 58.36,45.29 58.36,35.51 JP6.4
OTDI  (via drill 0.36)
  Top 0.203: JP1.6 63.75,2.11
  Top 0.305: R10.2 53.37,17.13 v52.52,17.13
  Bottom 0.305: 46.73,15.65 46.73,12.25 56.9,2.08 | 46.73,15.65 46.73,20.66 45.54,21.85 JP2.9 | v52.52,17.13 51.05,15.65 46.73,15.65
  Bottom 0.406: 56.9,2.08 56.94,2.11 JP1.6
OTDI1  (via drill 0.36)
  Top 0.203: JP6.6 63.75,28.02
  Top 0.305: R35.2 53.37,43.03 v52.52,43.03
  Bottom 0.305: 46.73,41.55 46.73,38.15 56.9,27.98 | 46.73,41.55 46.73,46.56 45.54,47.75 JP7.9 | v52.52,43.03 51.05,41.55 46.73,41.55
  Bottom 0.406: 56.9,27.98 56.94,28.02 JP6.6
OTDO
  Top 0.305: R11.1 56.79,1.53 57.5,1.53 58.14,2.16 58.14,8.08 60.13,9.75 | 60.13,9.75 JP1.3 | JP2.3 53.23,21.85 53.23,22.05 54.3,23.12 57.91,23.12 58.54,22.48 58.54,21.16 59.08,20.63 60.42,20.63 61.08,19.97 61.08,18.8 60.4,18.12 60.09,18.12 58.29,16.31 58.29,11.16 60.13,9.75
OTDO1
  Top 0.305: R31.1 56.79,27.43 57.5,27.43 58.14,28.07 58.14,33.98 60.13,35.65 | 60.13,35.65 JP6.3 | JP7.3 53.23,47.75 53.23,47.95 54.3,49.02 57.91,49.02 58.54,48.39 58.54,47.06 59.08,46.53 60.42,46.53 61.08,45.87 61.08,44.7 60.4,44.02 60.09,44.02 58.29,42.21 58.29,37.06 60.13,35.65
OTMS  (via drill 0.36)
  Top 0.203: 63.8,4.66 61.16,4.66 61.01,4.66 59.48,3.13 59.48,1.07 v59.3,0.89 | v46.33,1.53 R14.2
  Top 0.305: JP1.5 61.16,4.66
  Bottom 0.203: v59.3,0.89 46.96,0.89 v46.33,1.53
  Bottom 0.305: JP2.5 50.77,21.85 51.81,20.81 51.81,18.65 52.52,17.94 53.16,17.94 54.55,16.54 54.55,8.16 58.19,4.53 61.1,4.58 JP1.5
OTMS1  (via drill 0.36)
  Top 0.203: 63.8,30.55 61.16,30.55 61.01,30.55 59.48,29.03 59.48,26.97 v59.3,26.8 | v46.33,27.43 R37.2
  Top 0.305: 61.16,30.55 JP6.5
  Bottom 0.203: v59.3,26.8 46.96,26.8 v46.33,27.43
  Bottom 0.305: JP7.5 50.77,47.75 51.81,46.71 51.81,44.55 52.52,43.84 53.16,43.84 54.55,42.44 54.55,34.06 58.19,30.43 61.1,30.48 JP6.5
RD
  Top 0.203: IC1.13 23.92,3.42 23.92,5.32 24.89,6.28 27.25,6.28 28.62,7.65 28.62,9.66 29.61,10.65 31.34,10.65
  Top 0.254: IC8.P14 31.34,10.65
RD1
  Top 0.203: IC7.13 23.92,29.32 23.92,31.21 24.89,32.18 27.25,32.18 28.62,33.55 28.62,35.56 29.61,36.55 31.34,36.55
  Top 0.254: IC14.P14 31.34,36.55
RXF
  Top 0.203: 31.33,6.64 31.2,6.51 30.25,6.51 25.17,1.43 15.11,1.43 14.7,1.84 14.7,5.72 15.74,6.76 15.74,8.08 17.04,9.38 19.02,9.38 19.34,9.7 IC1.23
  Top 0.254: IC8.P19 31.33,6.64
RXF1
  Top 0.203: 31.33,32.54 31.2,32.41 30.25,32.41 25.17,27.33 15.11,27.33 14.7,27.73 14.7,31.62 15.74,32.66 15.74,33.98 17.04,35.28 19.02,35.28 19.34,35.6 IC7.23
  Top 0.254: IC14.P19 31.33,32.54
SNCE  (via drill 0.36)
  Top 0.203: IC4.2 47.04,5.34 v49.09,7.4 | v41.63,12.25 42.74,12.25 IC8.P44
  Bottom 0.203: v49.09,7.4 44.24,12.25 v41.63,12.25
SNCE1  (via drill 0.36)
  Top 0.203: IC11.2 47.04,31.24 v49.09,33.3 | v41.63,38.15 42.74,38.15 IC14.P44
  Bottom 0.203: v49.09,33.3 44.24,38.15 v41.63,38.15
SNCS  (via drill 0.36)
  Top 0.203: IC4.4 49.58,5.14 v49.55,5.16 | v41.14,11.46 IC8.P43
  Bottom 0.203: v49.55,5.16 49.55,5.9 43.99,11.46 v41.14,11.46
SNCS1  (via drill 0.36)
  Top 0.203: IC11.4 49.58,31.04 v49.55,31.06 | v41.14,37.36 IC14.P43
  Bottom 0.203: v49.55,31.06 49.55,31.8 43.99,37.36 v41.14,37.36
SNSTA
  Top 0.203: IC8.P35 42.81,5.01 45.74,5.01 48.71,7.98 49.37,7.98 50.69,6.66 54.63,6.66 55.93,5.37 IC4.9 | IC4.9
SNSTA1
  Top 0.203: IC14.P35 42.81,30.91 45.74,30.91 48.71,33.88 49.37,33.88 50.69,32.56 54.63,32.56 55.93,31.27 IC11.9 | IC11.9
STCK  (via drill 0.36)
  Top 0.203: IC8.P33 v41.05,1.39 v41.04,1.38 | v46.25,6.69 48.26,8.69 53.13,8.69 54.66,10.22 IC4.13
  Bottom 0.203: v41.04,1.38 41.04,1.48 v46.25,6.69
STCK1  (via drill 0.36)
  Top 0.203: IC14.P33 v41.05,27.29 v41.04,27.28 | v46.25,32.59 48.26,34.59 53.13,34.59 54.66,36.12 IC11.13
  Bottom 0.203: v41.04,27.28 41.04,27.38 v46.25,32.59
STDI  (via drill 0.36)
  Top 0.203: IC4.6 52.12,5.85 51.71,6.25 48.92,6.25 v48.46,5.8 | IC8.P42 41.64,10.66 v41.63,10.65
  Bottom 0.203: v48.46,5.8 43.58,10.67 v41.63,10.65
STDI1  (via drill 0.36)
  Top 0.203: IC11.6 52.12,31.75 51.71,32.16 48.92,32.16 v48.46,31.7 | IC14.P42 41.64,36.56 v41.63,36.55
  Bottom 0.203: v48.46,31.7 43.58,36.57 v41.63,36.55
STDO  (via drill 0.36)
  Top 0.203: IC8.P31 39.44,2.55 v39.44,1.4 | v45.16,7.12 47.57,9.53 v52.17,9.53 | v53.41,7.88 55.93,10.39 IC4.12
  Bottom 0.203: v45.16,7.12 v39.44,1.4 | v52.17,9.53 53.41,8.29 v53.41,7.88
STDO1  (via drill 0.36)
  Top 0.203: IC14.P31 39.44,28.45 v39.44,27.3 | v45.16,33.02 47.57,35.43 v52.17,35.43 | v53.41,33.78 55.93,36.3 IC11.12
  Bottom 0.203: v39.44,27.3 v45.16,33.02 | v52.17,35.43 53.41,34.19 v53.41,33.78
STMS  (via drill 0.36)
  Top 0.203: IC8.P34 42.74,4.25 v41.04,4.25 | v44.45,7.93 46.99,10.47 51.74,10.47 52.12,10.85 IC4.15
  Top 0.305: IC4.15 52.09,13.62
  Bottom 0.203: v41.04,4.25 44.45,7.65 v44.45,7.93
STMS1  (via drill 0.36)
  Top 0.203: IC14.P34 42.74,30.15 v41.04,30.15 | v44.45,33.83 46.99,36.37 51.74,36.37 52.12,36.75 IC11.15
  Top 0.305: IC11.15 52.09,39.52
  Bottom 0.203: v41.04,30.15 44.45,33.55 v44.45,33.83
TCK  (via drill 0.36)
  Top 0.406: v78.76,12.45 77.54,13.67 IC5.26
  Bottom 0.406: v78.76,12.45 78.76,6.86 arc-90 77.87,5.98 64.97,5.98 arc-90 JP5.4
TCK1  (via drill 0.36)
  Top 0.406: v78.76,38.35 77.54,39.57 IC12.26
  Bottom 0.406: v78.76,38.35 78.76,32.76 arc-90 77.87,31.88 64.97,31.88 arc-90 JP10.4
TDI  (via drill 0.36)
  Top 0.406: v85.09,8.07 IC5.1
  Bottom 0.406: v85.09,8.07 85.09,4.2 arc-90 82.67,1.78 64.79,1.78 arc-90 64.46,2.11 JP5.6
TDI1  (via drill 0.36)
  Top 0.406: v85.09,33.97 IC12.1
  Bottom 0.406: v85.09,33.97 85.09,30.1 arc-90 82.67,27.68 64.79,27.68 arc-90 64.46,28.02 JP10.6
TDO  (via drill 0.36)
  Top 0.406: v77.26,8.87 | v77.26,8.87 IC5.32
  Bottom 0.406: v77.26,8.87 arc-90 75.33,6.94 67.25,6.94 arc-90 64.44,9.76 63.78,9.76 arc90 JP5.3
TDO1  (via drill 0.36)
  Top 0.406: v77.26,34.77 | v77.26,34.77 IC12.32
  Bottom 0.406: v77.26,34.77 arc-90 75.33,32.84 67.25,32.84 arc-90 64.44,35.66 63.78,35.66 arc90 JP10.3
TMS  (via drill 0.36)
  Top 0.406: 87.57,12.86 IC5.7 85.5,12.87 arc90 v84.83,12.2
  Bottom 0.406: v84.83,12.2 84.83,9.58 arc-90 84.3,9.05 arc84 83.82,8.62 83.82,4.12 arc-90 82.55,2.85 66.29,2.85 arc-90 64.49,4.66 JP5.5
TMS1  (via drill 0.36)
  Top 0.406: 87.57,38.76 IC12.7 85.5,38.77 arc90 v84.83,38.1
  Bottom 0.406: v84.83,38.1 84.83,35.48 arc-90 84.3,34.95 arc84 83.82,34.52 83.82,30.02 arc-90 82.55,28.75 66.29,28.75 arc-90 64.49,30.55 JP10.5
TXE
  Top 0.203: 31.34,7.47 31.16,7.3 31.14,7.32 | IC1.22 19.99,9.82 19.2,9.02 17.27,9.02 16.18,7.93 16.18,6.64 15.11,5.57 15.11,2.04 15.36,1.78 24.86,1.78 30.53,7.45 31.34,7.45 IC8.P18
  Top 0.254: IC8.P18 31.34,7.47
TXE1
  Top 0.203: 31.34,33.37 31.16,33.2 31.14,33.22 | IC7.22 19.99,35.72 19.2,34.92 17.27,34.92 16.18,33.83 16.18,32.54 15.11,31.47 15.11,27.94 15.36,27.68 24.86,27.68 30.53,33.35 31.34,33.35 IC14.P18
  Top 0.254: IC14.P18 31.34,33.37
USB_GND  (via drill 0.36)
  Top 0.254: USB1.GND 12.14,5.37 14.96,8.18 v14.96,10.93
  Bottom 0.254: v14.96,10.93 IC3.4
USB_GND1  (via drill 0.36)
  Top 0.254: USB2.GND 12.14,31.27 14.96,34.09 v14.96,36.83
  Bottom 0.254: IC9.4 v14.96,36.83
VBUS  (via drill 0.36)
  Top 0.254: USB1.VBUS 10.82,8.57 11.15,8.9 v11.15,10.93
  Bottom 0.254: v11.15,10.93 IC3.1
VBUS1  (via drill 0.36)
  Top 0.254: USB2.VBUS 10.82,34.47 11.15,34.8 v11.15,36.83
  Bottom 0.254: IC9.1 v11.15,36.83
VCC  (via drill 0.36)
  Top 0.203: 65.86,13.75 65.63,14.59
  Top 0.406: 75.98,11.26 IC6.8 arc90 73.2,11.35 73.2,14.28 arc90 72.33,15.14 72.23,15.14 | 75.98,11.26 IC5.29 | 66.57,7.45 arc-90 65.86,8.16 65.86,13.75 arc90 64.23,15.37 64.23,15.3 arc-90 JP5.1 | 66.57,7.45 IC6.4 | 75.98,11.26 80.26,11.26 arc90 81.07,12.07 81.07,14.36 | 81.07,14.36 IC5.17 81.07,19.98 arc90 C13.1 C16.1 | 86.86,14.46 arc90 IC5.9 arc-90 86.86,14.46 | 84.55,14.46 81.17,14.46 arc90 81.07,14.36 | 84.55,14.46 v84.88,14.46 86.86,14.46 | C14.1 86.53,17.13 86.13,17.13 84.6,15.6 84.6,14.51 84.55,14.46 | R15.2 66.57,6.34 66.57,7.45 | LED11.A LED10.A LED9.A LED8.A LED7.A | LED7.A LED6.A LED5.A LED4.A LED3.A | LED7.A arc-90 96.64,12.05 v95.75,12.05 | C15.1 72.23,16.3 72.23,15.14 | 67.33,15.14 72.23,15.14 | 67.33,15.14 arc-90 66.44,16.03 R16.2 | 67.33,15.14 66.19,15.14 arc90 65.63,14.59
  Bottom 0.406: BAT1.1 95.73,12.07 arc-90 v95.75,12.05 95.75,14.56 arc90 94.23,16.09 86.51,16.09 arc90 v84.88,14.46
VCC1  (via drill 0.36)
  Top 0.203: 65.86,39.65 65.63,40.49
  Top 0.406: 75.98,37.16 IC13.8 arc90 73.2,37.25 73.2,40.18 arc90 72.33,41.05 72.23,41.05 | 75.98,37.16 IC12.29 | 66.57,33.35 arc-90 65.86,34.06 65.86,39.65 arc90 64.23,41.27 64.23,41.2 arc-90 JP10.1 | 66.57,33.35 IC13.4 | 75.98,37.16 80.26,37.16 arc90 81.07,37.97 81.07,40.26 | 81.07,40.26 IC12.17 81.07,45.88 arc90 C31.1 C34.1 | 86.86,40.36 arc90 IC12.9 arc-90 86.86,40.36 | 84.55,40.36 81.17,40.36 arc90 81.07,40.26 | 84.55,40.36 v84.88,40.36 86.86,40.36 | C32.1 86.53,43.03 86.13,43.03 84.6,41.5 84.6,40.41 84.55,40.36 | R54.2 66.57,32.24 66.57,33.35 | LED20.A LED19.A LED18.A LED17.A LED16.A | LED16.A LED15.A LED14.A LED21.A LED22.A | LED16.A arc-90 96.64,37.95 v95.75,37.95 | C33.1 72.23,42.2 72.23,41.05 | 67.33,41.05 72.23,41.05 | 67.33,41.05 arc-90 66.44,41.93 R51.2 | 67.33,41.05 66.19,41.05 arc90 65.63,40.49
  Bottom 0.406: BAT2.1 95.73,37.97 arc-90 v95.75,37.95 95.75,40.46 arc90 94.23,41.98 86.51,41.98 arc90 v84.88,40.36
VCC_TARGET
  Top 0.203: JP1.1 63.78,14.81
  Top 0.305: 57.45,19.36 56.26,20.55 54.31,20.55 JP2.4
  Top 0.406: JP3.1 57.45,19.36
  Bottom 0.406: JP3.1 61.18,17.99 JP1.1
VCC_TARGET1
  Top 0.203: JP6.1 63.78,40.72
  Top 0.305: 57.45,45.26 56.26,46.45 54.31,46.45 JP7.4
  Top 0.406: 57.45,45.26 JP9.1
  Bottom 0.406: JP9.1 61.18,43.89 JP6.1
WR
  Top 0.203: IC1.14 24.54,5.25 25.17,5.87 27.43,5.87 29.1,7.55 29.1,9.25 29.71,9.86 IC8.P15
  Top 0.254: IC8.P15 31.33,9.84
WR1
  Top 0.203: IC7.14 24.54,31.15 25.17,31.77 27.43,31.77 29.1,33.45 29.1,35.15 29.71,35.76 IC14.P15
  Top 0.254: IC14.P15 31.33,35.74

## Text on the board
tPlace: 1 | 1 | Jump to | Power | Target | VCC | GND | TDO | TCK | TMS | TDI | 1 | 1 | Jump to | Power | Target | VCC | GND | TDO | TCK | TMS | TDI
bPlace: nullspacelabs.com | NSL | [ | ] | nullspacelabs.com | NSL | [ | ]